# Altium PCB PS3604LD.PcbDoc
Units mm, origin at the board's own origin, x right, y up, seen from the top; angles counter-clockwise.
Board outline 53 x 36 mm, 2 copper layers (Top Layer, Bottom Layer), stack 1.571 mm thick; 15 components, 15 nets, 58 pads, 6 vias.
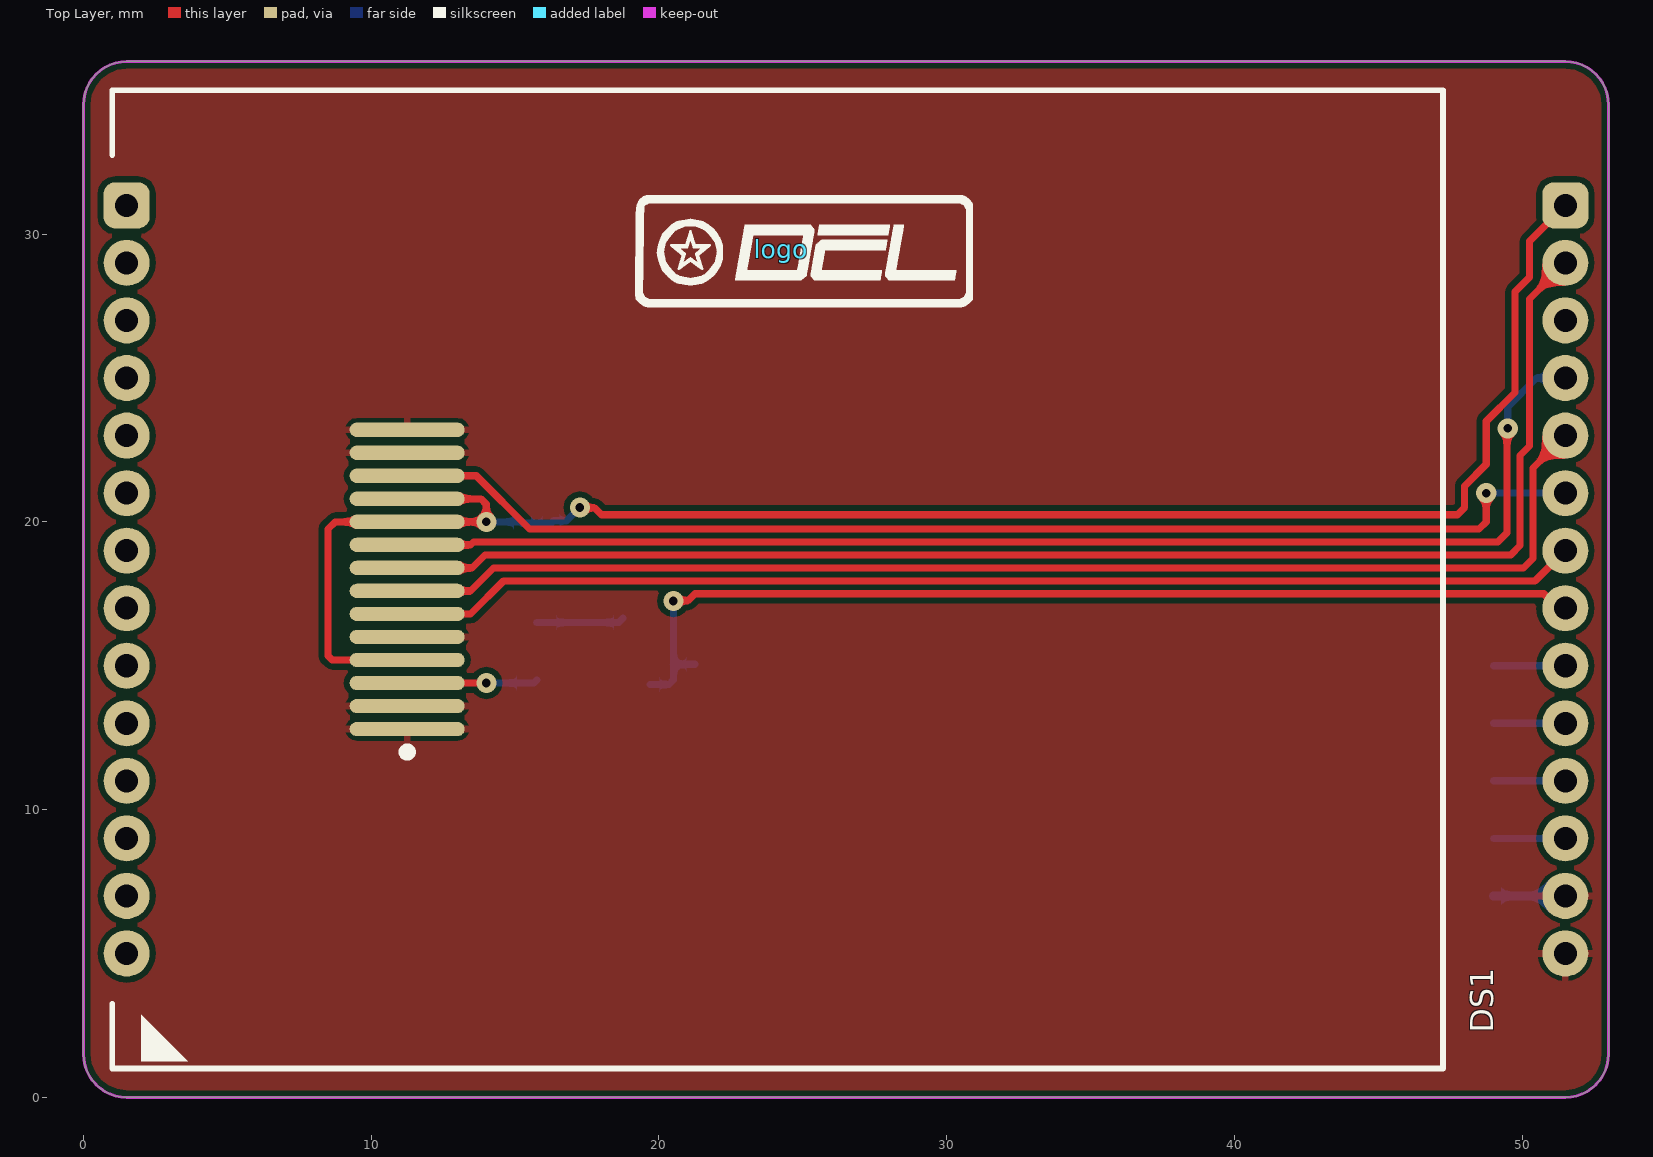
[diagram p0: Top Layer view]
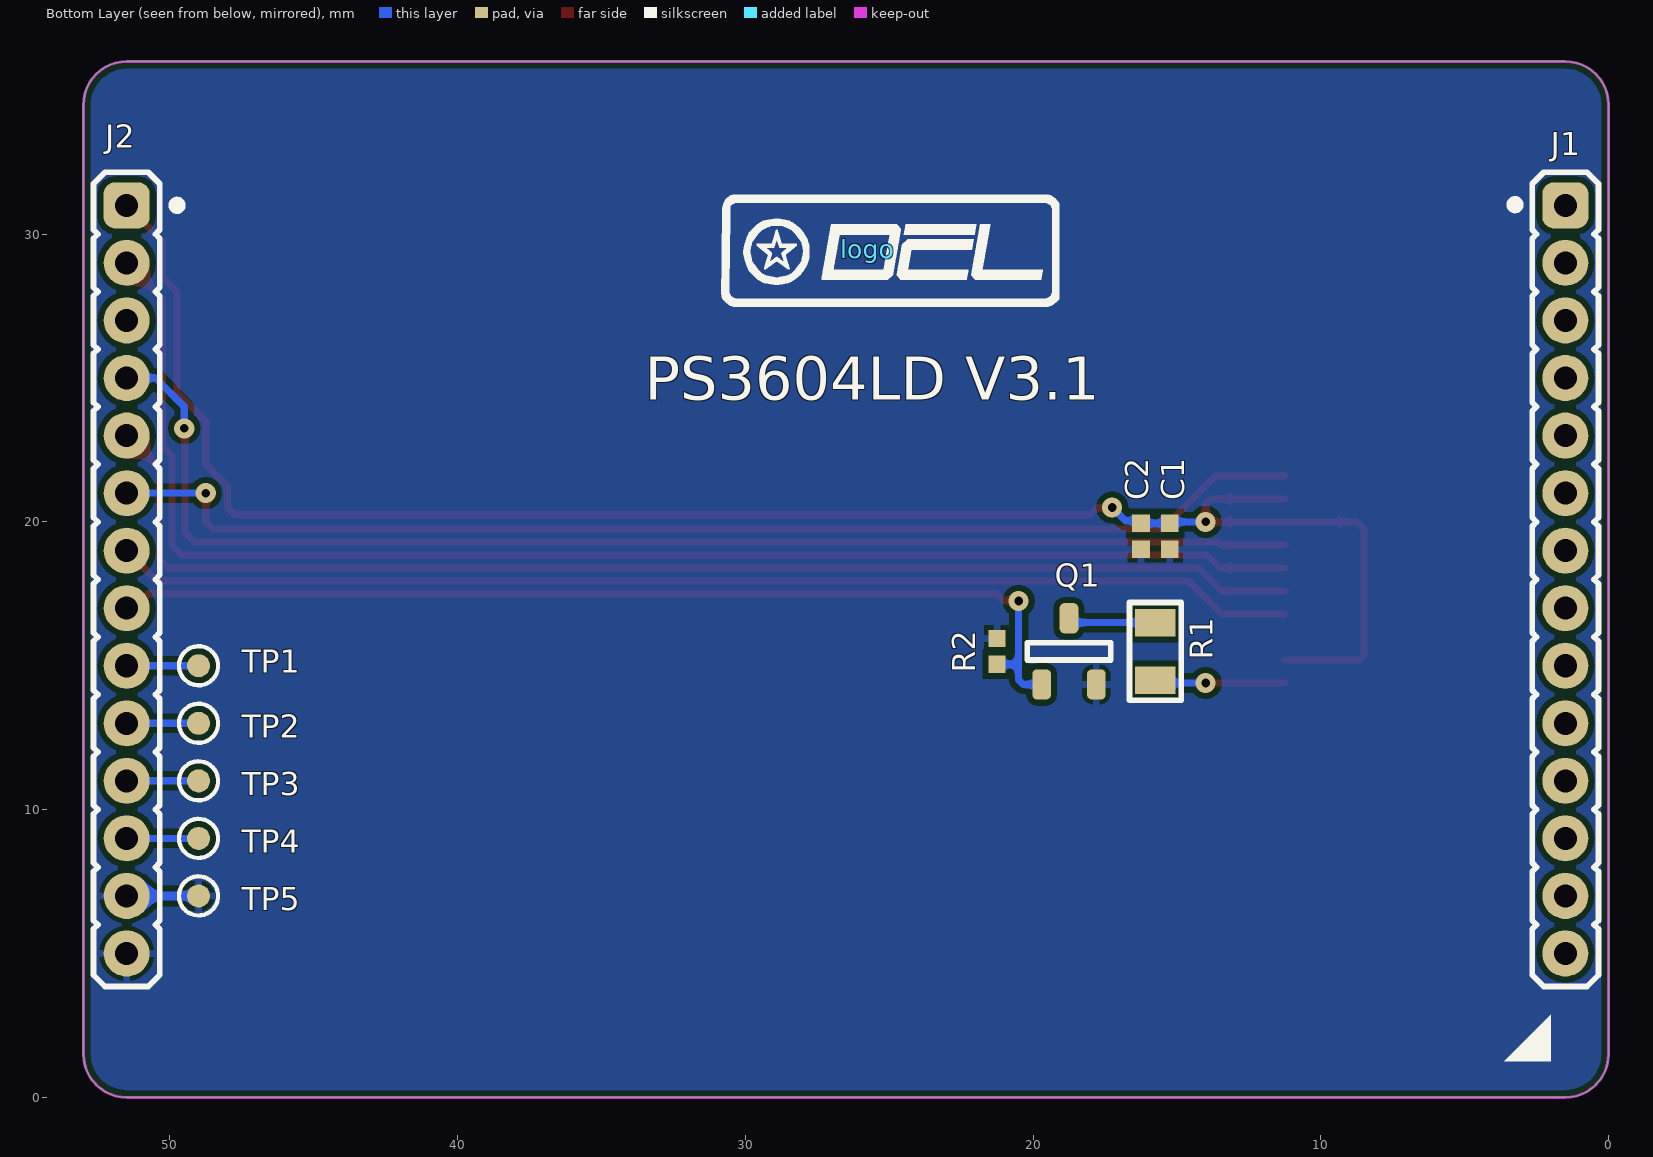
[diagram p1: Bottom Layer view, seen from below]
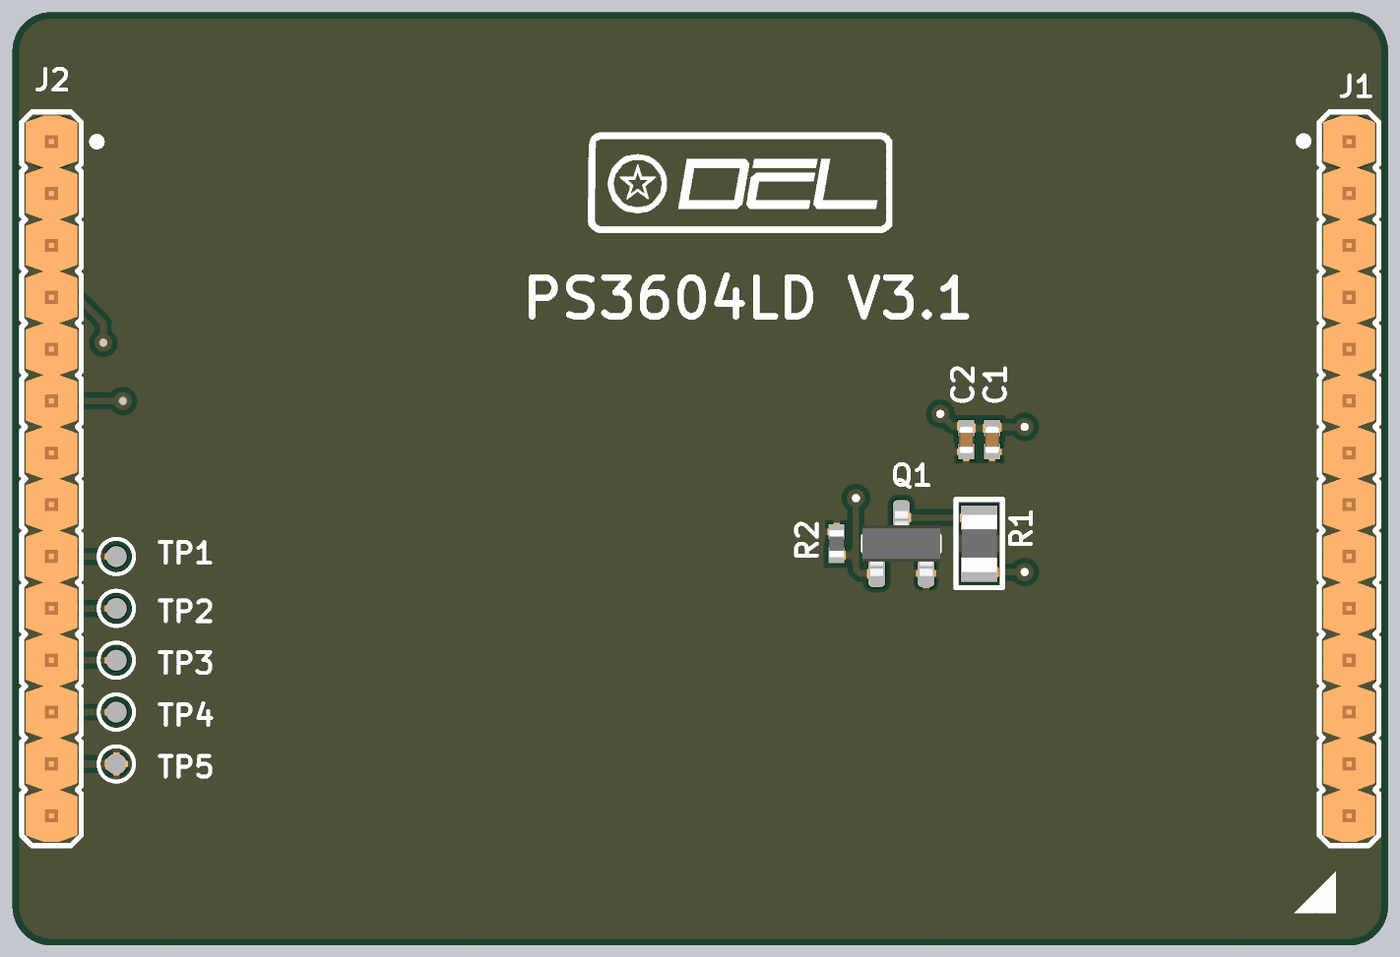
[diagram p2: 3D render of the assembled board from below, using the file's embedded part models]

## Layer stack, top to bottom
Top Solder: solder mask 0.0102, Solder Resist, Dk 3.5
Top Layer: signal copper 0.0356
Dielectric 1: dielectric 1.5, FR-4, Dk 4.8
Bottom Layer: signal copper 0.0356
Bottom Solder: solder mask 0.0102, Solder Resist, Dk 3.5

## Board outline
0,1.5 0,34.5 cw(c1.5,34.5) 1.5,36 51.5,36 cw(c51.5,34.5) 53,34.5 53,1.5 cw(c51.5,1.5) 51.5,0 1.5,0 cw(c1.5,1.5)

## Design rules (kind name [scope] priority, off if disabled: settings)
Clearance [All] p1: gap=0.2 ignorepadtopadclearanceinfootprint=FALSE except(0: Arc-Hole Track-Hole SMDPad-Hole THPad-Hole Via-Hole Fill-Hole Poly-Hole Region-Hole Text-Hole)
ComponentClearance [All] p1: gap=0 collisioncheckmode=3 verticalgap=0 showdistances=FALSE
HoleSize [All] p1: absolutevalues=TRUE maxlimit=4 minlimit=0.3 maxpercent=80.000 minpercent=20.000
HoleToHoleClearance [All] p1: gap=0.2 allowstackedmicrovias=TRUE
MinimumSolderMaskSliver [All] p1: minsoldermaskwidth=0.09
PolygonConnect PolygonConnectVia [IsVia] p1: connectstyle=Direct reliefconductorwidth=0.254 reliefentries=4 polygonreliefangle="90 Angle" airgapwidth=0.254
PolygonConnect [All] p2: connectstyle=Relief reliefconductorwidth=0.25 reliefentries=4 polygonreliefangle="90 Angle" airgapwidth=0.15
RoutingCorners [All] p1: cornerstyle=45-Degree minsetback=2.5 maxsetback=2.5
RoutingVias [All] p1: holewidth=0.3 width=1 viastyle="Through Hole" minholewidth=0.3 minwidth=0.03 maxholewidth=6 maxwidth=6
SilkToSilkClearance [All] p1: silktosilkclearance=0.1
SilkToSolderMaskClearance [IsPad] p1: minsilkscreentomaskgap=0.1 clearancetoexposedcopper=TRUE
SolderMaskExpansion [All] p1: expansion=0.05 istentingtop=FALSE
Width [All] p1: maxlimit=4 minlimit=0.2 preferedwidth=0.25
23 further rules are at their usual default settings.

## Classes and differential pairs
component class PS3604LD: C1 C2 C? J1 J2 Q1 R1 R2 TP1 TP2 TP3 TP4 TP5

## Components (designator, comment, footprint, x,y, rotation, side; value= is the part's Value field where it differs from the comment)
C1 "100n" CAPC1005X55N 15.25,19.5 r90 bottom
C2 "2.2u" CAPC1005X55N 16.25,19.5 r90 bottom
DS1 "JD-T18003" JD_T18003 1.25,18 r0 top locked
J1 "Socket 14" 3M_951114-8622-AR 1.5,18 r270 bottom
J2 "Socket 14" 3M_951114-8622-AR 51.5,18 r270 bottom
logo "" logo_2 24.25,29.5 r0 top
logo "" logo_2 25.75,29.5 r180 bottom
Q1 "2N7002" SOT95P240X130-3N 18.75,15.5 r90 bottom
R1 "3R" RESC2012X60N 15.75,15.5 r270 bottom
R2 "100k" RESC1005X40N 21.25,15.5 r270 bottom
TP1 "Test Point" TP_SMD_800 49,15 r90 bottom
TP2 "Test Point" TP_SMD_800 49,13 r90 bottom
TP3 "Test Point" TP_SMD_800 49,11 r90 bottom
TP4 "Test Point" TP_SMD_800 49,9 r90 bottom
TP5 "Test Point" TP_SMD_800 49,7 r90 bottom

## Footprints (in the part's own frame and the unit in brackets; to place one, negate y for a bottom-side part, rotate by r counter-clockwise, add the part's x,y. Pads: shape width x height; smd on the part's side, far side on the other; paste and mask are expansions set on the pad)
3M_951114-8622-AR [mm] "2 mm Straight, Solder Tail 951 Series"
  rrect50% 1.6x1.6 hole 0.8: 1(-13,0)
  round 1.6 hole 0.8: 2(-11,0) 3(-9,0) 4(-7,0) 5(-5,0) 6(-3,0) 7(-1,0) 8(1,0) 9(3,0) 10(5,0) 11(7,0) 12(9,0) 13(11,0) 14(13,0)
  silkscreen extent -14.15,-1.9 14.15,1.15, body extent -14,-1 14,1, height 5.9
CAPC1005X55N [mm] "Chip Capacitor, Body 1.0x0.55mm, IPC Medium Density"
  rect 0.62x0.62 smd: 1(-0.45,0) 2(0.45,0)
  body extent -0.52,-0.27 0.53,0.28, height 0.55
JD_T18003 [mm] "34.7 x 46.7 x 2.6 mm"
  oval 4x0.5 smd: 1(10,-5.2) 2(10,-4.4) 3(10,-3.6) 4(10,-2.8) 5(10,-2) 6(10,-1.2) 7(10,-0.4) 8(10,0.4) 9(10,1.2) 10(10,2) 11(10,2.8) 12(10,3.6) 13(10,4.4) 14(10,5.2)
  silkscreen extent -0.25,-17 46,17, body extent -0.23,-17 46,17, height 2.6
logo_2 [mm]
  silkscreen extent -5.08,-2.02 6.65,1.86
RESC1005X40N [mm] "Chip Resistor, EIA 0402, Metric 1005, Body 1.0x0.5mm, IPC Medium Density"
  rect 0.6x0.6 smd: 1(-0.45,0) 2(0.45,0)
  body extent -0.52,-0.27 0.53,0.28, height 0.4
RESC2012X60N [mm] "Chip Resistor, EIA 0805, Metric 2012, Body 2.0x1.2mm, IPC Medium Density"
  rect 0.95x1.4 smd: 1(-1,0) 2(1,0)
  silkscreen extent -1.7,-0.9 1.7,0.9, body extent -1.1,-0.67 1.1,0.68, height 0.6
SOT95P240X130-3N [mm] "SOT23 3-Leads, Pitch 0.95mm - Body 1.3x2.9mm, IPC Medium Density"
  rrect50% 1.05x0.65 smd: 1(-1.15,0.95) 2(-1.15,-0.95) 3(1.15,0)
  silkscreen extent -0.3,-1.45 0.3,1.45, body extent -1.25,-1.5 1.25,1.5, height 1.3
TP_SMD_800 [mm]
  round 0.8 smd: 1(0,0)
  silkscreen extent -0.68,-0.68 0.68,0.68

## Part data
C1: library part CC0402_100NF_16V_10%_X7R, "Non-polarised capacitor", Case=0402, Manufacturer=GENERIC, Manufacturer1 ComponentHeight=0.55mm, Manufacturer1 Example=PHYCOMP, Manufacturer1 Part Number=223878715649, Tolerance=±10%, Voltage=16V, Author="CERN DEM JLC", Component Type=Standard, CreateDate=03.12.2007, HelpURL=\\cern.ch\dfs\Applications\Altium\Datasheets\CC0402_X7R_PHYCOMP.pdf, LatestRevisionDate=03.12.2007, Manufacturer Part Number=CC0402_100NF_16V_10%_X7R, Mounted=Yes, Part Description="SMD Multilayer Chip Ceramic Capacitor", Part Number=CC0402_100NF_16V_10%_X7R, Pin Count=2, SMD=Yes, Socket=No, Status="Not Recommended", TC=X7R
C2: library part CC0402_2.2UF_6.3V_20%_X5R, "Non-polarised capacitor", Case=0402, Manufacturer=GENERIC, Manufacturer1 ComponentHeight=0.55mm, Tolerance=±20%, Voltage=6.3V, Author=ELMAN, Component Type=Standard, CreateDate=19.05.2015, HelpURL=\\cern.ch\dfs\Applications\Altium\Datasheets\CC0402_X5R_KEMET.pdf, LatestRevisionDate=19.05.2015, Manufacturer Part Number=CC0402_2.2UF_6.3V_20%_X5R, Mounted=Yes, Part Description="SMD Multilayer Chip Ceramic Capacitor", Part Number=CC0402_2.2UF_6.3V_20%_X5R, Pin Count=2, SMD=Yes, Socket=No, Status=Preferred, TC=X5R
DS1: library part JD_T18003, Color="16 bit / pix", Manufacturer="Truly Semiconductors Inc.", Manufacturer Part Number=JD-T18003-T01, Author=DEL, ComponentHeight=2.6mm, Component Type=Standard, CreateDate=26.02.2018, Device=JD-T18003, LatestRevisionDate=26.02.2018, Mounted=Yes, PackageDescription="34.7 x 46.7 x 2.6 mm", Part Description="1.8\" SPI TFT display, 160x128 18-bit color - ST7735R driver", Part Number=JD_T18003, Pin Count=14, SMD=Yes, Socket=No
J1 J2: library part 3M_951114-8622-AR, "Connector 14 Male", Manufacturer=3M, Manufacturer Part Number=951114-8622-AR, Author=DEL, ComponentHeight=5.9mm, Component Type=Standard, CreateDate=04.11.2017, Family="Socket 14", LatestRevisionDate=04.11.2017, Mounted=Yes, Part Description="2mm Pin Strip Header, 951 Series", Part Number=3M_951114-8622-AR, Pin Count=14, SMD=No, Socket=No, Status=None
Q1: "N-CHANNEL MOSFET WITH DIODE", Case=SOT23-3, Manufacturer="FAIRCHILD SEMICONDUCTOR", Author="CERN DEM JLC", ComponentHeight=1.3mm, Component Type=Standard, CreateDate=20.08.2008, Device=2N7002, HelpURL=\\cern.ch\dfs\Applications\Altium\Datasheets\2N7002.pdf, LatestRevisionDate=07.04.2009, Manufacturer Part Number=2N7002, Mounted=Yes, PackageDescription="SOT23 3-Leads, Pitch 0.95mm - Body 1.3x2.9mm, IPC Medium Density", Part Description="60V 280mA N-Channel Enhancement Mode Field Effect Transistor (FET)", Part Number=2N7002, Pin Count=3, SMD=Yes, Socket=No
R1: library part R0805_3R_1%_0.125W_200PPM, "Resistor - 1%", Case=0805, Manufacturer=GENERIC, Manufacturer1 ComponentHeight=0.65mm, Manufacturer1 Example=PHYCOMP, Manufacturer1 Part Number=232273463008, Power=0.125W, Tolerance=±1%, Author="CERN DEM JLC", Component Type=Standard, CreateDate=03.12.2007, HelpURL=\\cern.ch\dfs\Applications\Altium\Datasheets\R0805_Phycomp_RC0805.pdf, LatestRevisionDate=24.06.2009, Manufacturer Part Number=R0805_3R_1%_0.125W_200PPM, Mounted=Yes, Part Description="General Purpose Thick Film Chip Resistor", Part Number=R0805_3R_1%_0.125W_200PPM, Pin Count=2, SMD=Yes, Socket=No, Status=Preferred, TC=±200ppm/°C
R2: library part R0402_100K_1%_0.0625W_100PPM, "Resistor - 1%", Case=0402, Manufacturer=GENERIC, Manufacturer1 ComponentHeight=0.4mm, Manufacturer1 Example=PHYCOMP, Manufacturer1 Part Number=232270671004, Power=0.0625W, Tolerance=±1%, Author="CERN DEM JLC", Component Type=Standard, CreateDate=03.12.2007, HelpURL=\\cern.ch\dfs\Applications\Altium\Datasheets\R0402_Phycomp_RC0402.pdf, LatestRevisionDate=13.03.2008, Manufacturer Part Number=R0402_100K_1%_0.0625W_100PPM, Mounted=Yes, Part Description="General Purpose Thick Film Chip Resistor", Part Number=R0402_100K_1%_0.0625W_100PPM, Pin Count=2, SMD=Yes, Socket=No, Status="Not recommended", TC=±100ppm/°C
TP1 TP2 TP3 TP4 TP5: library part TP_SMD_0.8MM, Author=DEL, ComponentHeight=0mm, Component Type="Standard (No BOM)", CreateDate=14.11.2017, Family="Test Point", LatestRevisionDate=14.11.2017, Mounted=No, PackageDescription="0.8mm round SMD Pad", Part Description="0.8mm round SMD Pad", Part Number=TP_SMD_0.8MM, Pin Count=1, SMD=No, Socket=No, Status=None

## Via types
v1: diameter 0.7, hole 0.3, Top Layer to Bottom Layer, tented both sides, 6 vias

## Nets (pads, with @x,y where several pads share a name; then routed paths per layer and width w, separated by ;. In a path a pad name is that pad's centre, name@x,y a point inside that pad or via, vN(x,y) a via of type N, cw(c..) or ccw(c..) an arc to the next point about the centre after c; other vN are vias at no path point)
0V: C1.1 C2.1 DS1.1 DS1.2 DS1.5 DS1.13 DS1.14 J2.13 J2.14 Q1.2 R2.1 TP5.1 | length 2.5
  Bottom Layer w0.3: TP5.1 J2.13
+3.3V: C1.2 C2.2 DS1.4 DS1.10 DS1.11 J2.1 | length 62.6
  Top Layer w0.25: DS1.4 8.646,15.2 8.5,15.346 8.5,19.75 8.75,20 DS1.10 v1(14,20) 14,20.614 13.814,20.8 DS1.11 ; v1(17.25,20.5) 17.263,20.487 17.763,20.487 18,20.25 47.75,20.25 48,20.5 48,21.25 48.75,22 48.75,23.5 49.75,24.5 49.75,28 50.25,28.5 50.25,29.75 J2.1
  Bottom Layer w0.25: v1(14,20) C1.2@15.25,20 ; C1.2 C2.2 16.339,20.039 16.789,20.039 v1(17.25,20.5)
GP_GP0: J2.10 TP2.1 | length 2.5
  Bottom Layer w0.25: TP2.1 J2.10
GP_GP1: J2.9 TP1.1 | length 2.5
  Bottom Layer w0.25: TP1.1 J2.9
LCD_CS: DS1.12 J2.6 | length 42.1
  Top Layer w0.25: DS1.12 13.65,21.6 15.5,19.75 48.5,19.75 48.75,20 v1(48.75,21)
  Bottom Layer w0.25: v1(48.75,21) J2.6
LCD_DC: DS1.7 J2.5 | length 44.3
  Top Layer w0.25: DS1.7 13.454,17.6 14.254,18.4 50.05,18.4 50.375,18.725 50.375,21.875 J2.5
LCD_LED_K: DS1.3 R1.2 | length 4.5
  Top Layer w0.25: DS1.3 v1(14,14.4)
  Bottom Layer w0.25: v1(14,14.4) 15.65,14.4 R1.2
LCD_LED_PWM: J2.8 Q1.1 R2.2 | length 35.7
  Top Layer w0.25: v1(20.5,17.25) 20.513,17.263 21.013,17.263 21.25,17.5 50.75,17.5 51.25,17 J2.8
  Bottom Layer w0.25: Q1.1 20.35,14.35 20.5,14.5 20.5,15.05 ; v1(20.5,17.25) 20.5,15.05 ; R2.2 20.5,15.05
LCD_RST: DS1.6 J2.7 | length 41.2
  Top Layer w0.25: DS1.6 13.454,16.8 14.604,17.95 50.45,17.95 J2.7
NetQ1_3: Q1.3 R1.1 | length 3.1
  Bottom Layer w0.25: R1.1 18.6,16.5 Q1.3
SPI_CLK: DS1.9 J2.4 | length 45.2
  Top Layer w0.25: DS1.9 13.45,19.2 13.55,19.3 49.15,19.3 49.475,19.625 49.475,23.225 v1(49.5,23.25)
  Bottom Layer w0.25: v1(49.5,23.25) 49.5,24 50.5,25 J2.4
SPI_MISO: J2.3
SPI_MOSI: DS1.8 J2.2 | length 49.5
  Top Layer w0.25: DS1.8 13.504,18.4 13.954,18.85 49.6,18.85 49.925,19.175 49.925,22.311 50.25,22.636 50.25,27.75 J2.2
UART_RX: J2.11 TP3.1 | length 2.5
  Bottom Layer w0.25: TP3.1 J2.11
UART_TX: J2.12 TP4.1 | length 2.5
  Bottom Layer w0.25: TP4.1 J2.12
pads on no net: J1.1 J1.2 J1.3 J1.4 J1.5 J1.6 J1.7 J1.8 J1.9 J1.10 J1.11 J1.12 J1.13 J1.14

## Polygon pours and split planes (outlines as drawn)
no net on Bottom Overlay "NONET_L01_P-001" (solid): 2,1.25 2,2.873 3.623,1.25
no net on Top Overlay "NONET_L01_P-001" (solid): 2,1.25 2,2.873 3.623,1.25
0V on Top Layer "0V_L01_P000" (solid, pour order 0): 0,1.5 0,34.5 cw(c1.5,34.5) 1.5,36 51.5,36 cw(c51.5,34.5) 53,34.5 53,1.5 cw(c51.5,1.5) 51.5,0 1.5,0 cw(c1.5,1.5)
0V on Bottom Layer "0V_L02_P001" (solid, pour order 1): 0,1.5 0,34.5 cw(c1.5,34.5) 1.5,36 51.5,36 cw(c51.5,34.5) 53,34.5 53,1.5 cw(c51.5,1.5) 51.5,0 1.5,0 cw(c1.5,1.5)

## Keep-outs
Keep-Out Layer:
  the board outline again, w0.1

## Silkscreen, mask and mechanical layers (free items; w line width, h text height)
Bottom Overlay:
  text "PS3604LD V3.1" at 33.5,24.25 h1.5

## Dimensions
1.5,36 to 1.5,0 on Mechanical 14
0,34.5 to 53,34.5 on Mechanical 14